# Altium PCB STM32F302VC_EVM.PcbDoc (part 4 of 19)
Units mil, origin at the board's own origin, x right, y up, seen from the top; angles counter-clockwise.
Board outline 3937.01 x 3937.01 mil, 2 copper layers (Top Layer, Bottom Layer); 117 components, 166 nets, 602 pads, 373 vias.
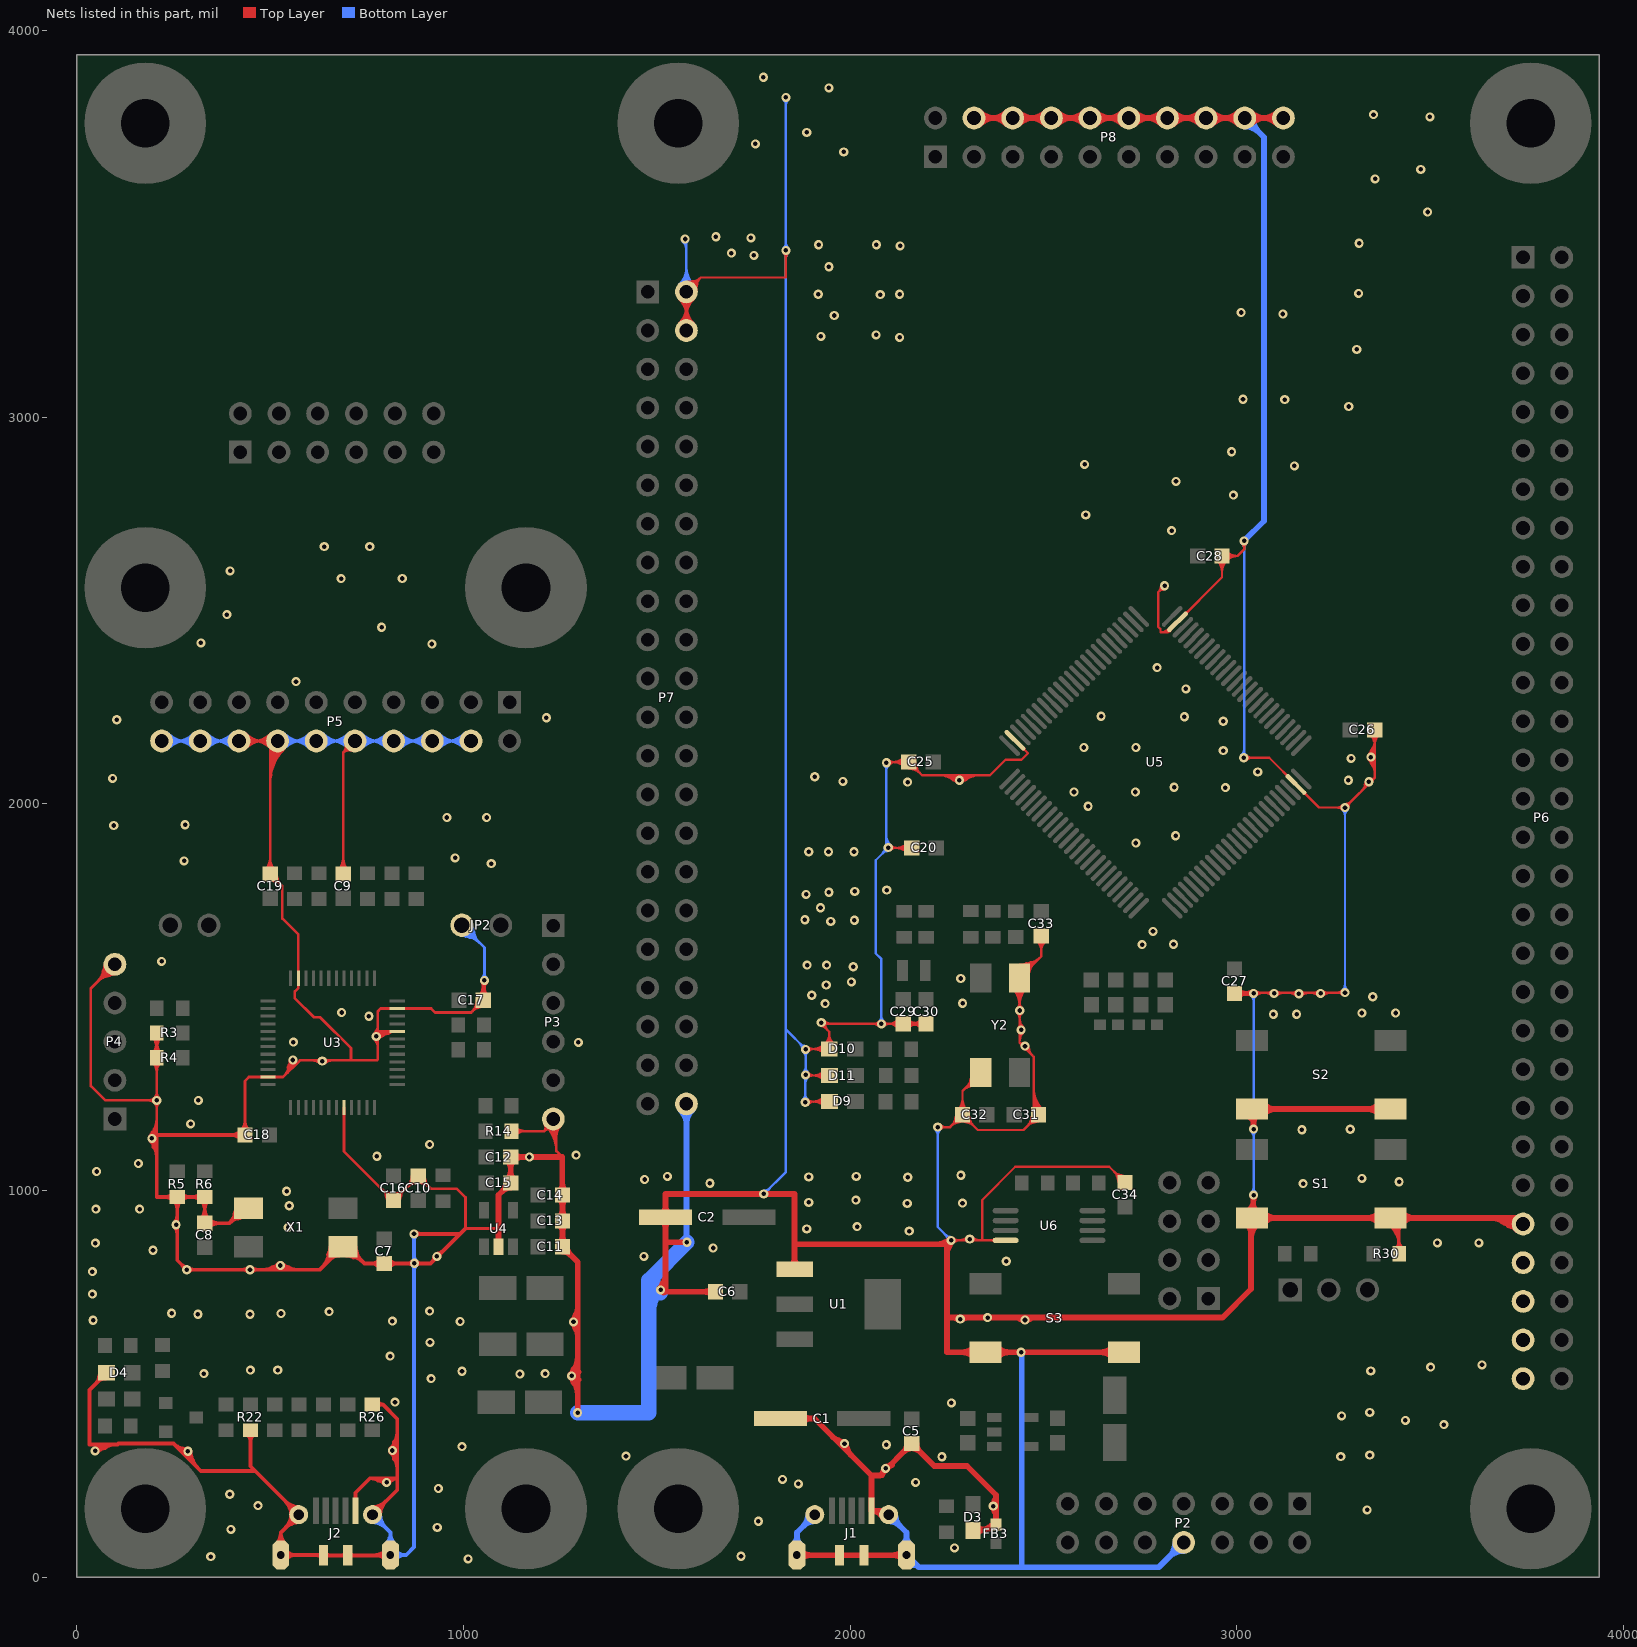
[diagram p4: the nets of this part, all layers, seen from the top]

## Via types
v1: diameter 23.62, hole 11.81, Top Layer to Bottom Layer, tented both sides, 372 vias
v2: diameter 50, hole 28, Top Layer to Bottom Layer, tented both sides, 1 vias

## Nets (pads, with @x,y where several pads share a name; then routed paths per layer and width w, separated by ;. In a path a pad name is that pad's centre, name@x,y a point inside that pad or via, vN(x,y) a via of type N, cw(c..) or ccw(c..) an arc to the next point about the centre after c; other vN are vias at no path point) (continued)
GND: (continued)
  Top Layer w6: 2682.27,1049.15 ccw(c2710.76,1077.64) C34.1@2710.76,1037.35 ; 2682.27,1049.15 ccw(c2710.76,1077.64) C34.1@2710.76,1037.35 ; 2682.27,1049.15 cw(c2653.79,1020.67) C34.1@2694.07,1020.67 ; 2682.27,1049.15 ccw(c2710.76,1077.64) C34.1@2710.76,1037.35 ; 2682.27,1049.15 cw(c2653.79,1020.67) C34.1@2694.07,1020.67 ; 2688.99,1039.63 ccw(c2716.13,1046.91) C34.1@2710.49,1019.38 ; 2688.99,1039.63 ccw(c2716.13,1046.91) C34.1@2710.49,1019.38 ; 2688.99,1039.63 ccw(c2716.13,1046.91) C34.1@2710.49,1019.38 ; C34.1@2691.5,1030.26 ccw(c2713.95,1036.27) C34.1@2709.29,1013.5 ; C34.1@2691.5,1030.26 ccw(c2713.95,1036.27) C34.1@2709.29,1013.5 ; C34.1@2691.5,1030.26 ccw(c2713.95,1036.27) C34.1@2709.29,1013.5 ; 2691.79,1042.44 cw(c2684.52,1015.3) C34.1@2712.04,1020.93 ; 2691.79,1042.44 cw(c2684.52,1015.3) C34.1@2712.04,1020.93 ; 2691.79,1042.44 cw(c2684.52,1015.3) C34.1@2712.04,1020.93 ; C34.1@2692.52,1038.91 cw(c2674.27,1020.67) C34.1@2700.07,1020.67 ; C34.1@2692.52,1038.91 ccw(c2710.76,1057.15) C34.1@2710.76,1031.35 ; C34.1@2692.52,1038.91 ccw(c2710.76,1057.15) C34.1@2710.76,1031.35 ; C34.1@2692.52,1038.91 cw(c2674.27,1020.67) C34.1@2700.07,1020.67 ; C34.1@2692.52,1038.91 ccw(c2710.76,1057.15) C34.1@2710.76,1031.35 ; C34.1@2692.52,1038.91 cw(c2674.27,1020.67) C34.1@2700.07,1020.67 ; C34.1@2701.17,1039.92 cw(c2695.15,1017.47) C34.1@2717.92,1022.14 ; C34.1@2701.17,1039.92 cw(c2695.15,1017.47) C34.1@2717.92,1022.14 ; C34.1@2701.17,1039.92 cw(c2695.15,1017.47) C34.1@2717.92,1022.14 ; 2797.95,2548.94 cw(c2812.99,2533.89) v1@2812.99,2555.17 ; 2797.95,2548.94 ccw(c2782.91,2563.98) v1@2804.18,2563.98 ; 2797.95,2548.94 ccw(c2782.91,2563.98) v1@2804.18,2563.98 ; 2797.95,2548.94 cw(c2812.99,2533.89) v1@2812.99,2555.17 ; 2797.95,2548.94 ccw(c2782.91,2563.98) v1@2804.18,2563.98 ; 2797.95,2548.94 cw(c2812.99,2533.89) v1@2812.99,2555.17 ; 2802.54,2557.86 cw(c2814.92,2554.54) v1@2812.35,2567.1 ; 2802.54,2557.86 cw(c2814.92,2554.54) v1@2812.35,2567.1 ; 2802.54,2557.86 cw(c2814.92,2554.54) v1@2812.35,2567.1 ; 2804.53,2443.9 ccw(c2804.53,2470.73) U5.74@2823.51,2451.76 ; 2804.53,2443.9 ccw(c2804.53,2470.73) U5.74@2823.51,2451.76 ; 2804.53,2443.9 ccw(c2804.53,2470.73) U5.74@2823.51,2451.76 ; 2806.88,2553.53 ccw(c2803.56,2565.91) v1@2816.12,2563.34 ; 2806.88,2553.53 ccw(c2803.56,2565.91) v1@2816.12,2563.34 ; 2806.88,2553.53 ccw(c2803.56,2565.91) v1@2816.12,2563.34 ; 2812.88,2445.62 cw(c2820.28,2432.82) U5.74@2824.69,2446.93 ; 2812.88,2445.62 cw(c2820.28,2432.82) U5.74@2824.69,2446.93 ; 2812.88,2445.62 cw(c2820.28,2432.82) U5.74@2824.69,2446.93 ; 2819.02,2443.9 ccw(c2819.02,2456.24) U5.74@2827.75,2447.51 ; 2819.02,2443.9 ccw(c2819.02,2456.24) U5.74@2827.75,2447.51 ; 2819.02,2443.9 ccw(c2819.02,2456.24) U5.74@2827.75,2447.51 ; 2820.6,2444.74 cw(c2825.56,2439.78) U5.74@2825.56,2446.8 ; 2820.6,2444.74 ccw(c2815.64,2449.7) U5.74@2822.66,2449.7 ; 2820.6,2444.74 ccw(c2815.64,2449.7) U5.74@2822.66,2449.7 ; 2820.6,2444.74 cw(c2825.56,2439.78) U5.74@2825.56,2446.8 ; 2820.6,2444.74 ccw(c2815.64,2449.7) U5.74@2822.66,2449.7 ; 2820.6,2444.74 cw(c2825.56,2439.78) U5.74@2825.56,2446.8 ; 2820.72,2443.46 ccw(c2818.43,2447.42) U5.74@2822.79,2448.82 ; 2820.72,2443.46 ccw(c2818.43,2447.42) U5.74@2822.79,2448.82 ; 2820.72,2443.46 ccw(c2818.43,2447.42) U5.74@2822.79,2448.82 ; U5.74@2867.32,2494.36 ccw(c2867.32,2501.38) 2872.28,2496.42 ; U5.74@2867.32,2494.36 ccw(c2867.32,2501.38) 2872.28,2496.42 ; U5.74@2867.32,2494.36 ccw(c2867.32,2501.38) 2872.28,2496.42 ; U5.74@2870.22,2491.46 cw(c2877.24,2491.46) 2872.28,2496.42 ; U5.74@2870.22,2491.46 cw(c2877.24,2491.46) 2872.28,2496.42 ; U5.74@2870.22,2491.46 cw(c2877.24,2491.46) 2872.28,2496.42 ; C28.1@2949.82,2628.95 cw(c2921.33,2600.47) 2961.61,2600.47 ; C28.1@2949.82,2628.95 cw(c2921.33,2600.47) 2961.61,2600.47 ; C28.1@2949.82,2628.95 cw(c2921.33,2600.47) 2961.61,2600.47 ; C28.1@2954.06,2633.19 cw(c2935.82,2614.95) 2961.61,2614.95 ; C28.1@2954.06,2633.19 cw(c2935.82,2614.95) 2961.61,2614.95 ; C28.1@2954.06,2633.19 cw(c2935.82,2614.95) 2961.61,2614.95 ; 2961.61,2600.47 cw(c3001.9,2600.47) C28.1@2973.41,2628.95 ; 2961.61,2600.47 cw(c3001.9,2600.47) C28.1@2973.41,2628.95 ; 2961.61,2600.47 cw(c3001.9,2600.47) C28.1@2973.41,2628.95 ; 2961.61,2614.95 cw(c2987.41,2614.95) C28.1@2969.17,2633.19 ; 2961.61,2614.95 cw(c2987.41,2614.95) C28.1@2969.17,2633.19 ; 2961.61,2614.95 cw(c2987.41,2614.95) C28.1@2969.17,2633.19 ; C28.1@2969.2,2633.22 cw(c2987.26,2615.32) 2987.26,2640.75 ; C28.1@2969.2,2633.22 cw(c2987.26,2615.32) 2987.26,2640.75 ; C28.1@2969.2,2633.22 cw(c2987.26,2615.32) 2987.26,2640.75 ; C28.1@2969.2,2648.27 ccw(c2987.26,2666.18) 2987.26,2640.75 ; C28.1@2969.2,2648.27 ccw(c2987.26,2666.18) 2987.26,2640.75 ; C28.1@2969.2,2648.27 ccw(c2987.26,2666.18) 2987.26,2640.75 ; C28.1@2973.46,2629 cw(c3001.66,2601.03) 3001.66,2640.75 ; C28.1@2973.46,2629 cw(c3001.66,2601.03) 3001.66,2640.75 ; C28.1@2973.46,2629 cw(c3001.66,2601.03) 3001.66,2640.75 ; C28.1@2973.46,2652.5 ccw(c3001.66,2680.46) 3001.66,2640.75 ; C28.1@2973.46,2652.5 ccw(c3001.66,2680.46) 3001.66,2640.75 ; C28.1@2973.46,2652.5 ccw(c3001.66,2680.46) 3001.66,2640.75 ; C27.1@3001.65,1502.29 cw(c3019.89,1484.05) 3019.89,1509.84 ; C27.1@3001.65,1502.29 cw(c3019.89,1484.05) 3019.89,1509.84 ; C27.1@3001.65,1502.29 cw(c3019.89,1484.05) 3019.89,1509.84 ; C27.1@3001.65,1517.4 ccw(c3019.89,1535.64) 3019.89,1509.84 ; C27.1@3001.65,1517.4 ccw(c3019.89,1535.64) 3019.89,1509.84 ; C27.1@3001.65,1517.4 ccw(c3019.89,1535.64) 3019.89,1509.84 ; C27.1@3005.89,1498.04 cw(c3034.38,1469.56) v1@3034.38,1509.84 ; C27.1@3005.89,1498.04 cw(c3034.38,1469.56) v1@3034.38,1509.84 ; C27.1@3005.89,1498.04 cw(c3034.38,1469.56) v1@3034.38,1509.84 ; C27.1@3005.89,1521.64 ccw(c3034.38,1550.12) v1@3034.38,1509.84 ; C27.1@3005.89,1521.64 ccw(c3034.38,1550.12) v1@3034.38,1509.84 ; C27.1@3005.89,1521.64 ccw(c3034.38,1550.12) v1@3034.38,1509.84 ; v1@3012.47,2673.89 cw(c2997.43,2658.85) 3018.7,2658.85 ; v1@3012.47,2673.89 cw(c2997.43,2658.85) 3018.7,2658.85 ; v1@3012.47,2673.89 cw(c2997.43,2658.85) 3018.7,2658.85 ; 3018.1,1505.48 cw(c3024.81,1480.45) v1@3038.62,1502.38 ; 3018.1,1505.48 cw(c3024.81,1480.45) v1@3038.62,1502.38 ; 3018.1,1505.48 cw(c3024.81,1480.45) v1@3038.62,1502.38 ; 3018.1,1505.48 cw(c3024.81,1480.45) v1@3038.62,1502.38 ; 3018.1,1505.48 cw(c3024.81,1480.45) v1@3038.62,1502.38 ; 3018.1,1505.48 cw(c3024.81,1480.45) v1@3038.62,1502.38 ; 3018.1,1514.2 ccw(c3024.81,1539.24) v1@3038.62,1517.3 ; 3018.1,1514.2 ccw(c3024.81,1539.24) v1@3038.62,1517.3 ; 3018.1,1514.2 ccw(c3024.81,1539.24) v1@3038.62,1517.3 ; 3018.1,1514.2 ccw(c3024.81,1539.24) v1@3038.62,1517.3 ; 3018.1,1514.2 ccw(c3024.81,1539.24) v1@3038.62,1517.3 ; 3018.1,1514.2 ccw(c3024.81,1539.24) v1@3038.62,1517.3 ; 3018.7,2658.85 cw(c3039.97,2658.85) v1@3024.93,2673.89 ; 3018.7,2658.85 cw(c3039.97,2658.85) v1@3024.93,2673.89 ; 3018.7,2658.85 cw(c3039.97,2658.85) v1@3024.93,2673.89 ; 3022.04,1509.84 cw(c3022.04,1488.57) v1@3037.08,1503.61 ; 3022.04,1509.84 ccw(c3022.04,1531.11) v1@3037.08,1516.07 ; 3022.04,1509.84 ccw(c3022.04,1531.11) v1@3037.08,1516.07 ; 3022.04,1509.84 cw(c3022.04,1488.57) v1@3037.08,1503.61 ; 3022.04,1509.84 ccw(c3022.04,1531.11) v1@3037.08,1516.07 ; 3022.04,1509.84 cw(c3022.04,1488.57) v1@3037.08,1503.61 ; v1@3023.95,2112.86 cw(c3038.99,2097.82) 3038.99,2119.09 ; v1@3023.95,2112.86 cw(c3038.99,2097.82) 3038.99,2119.09 ; v1@3023.95,2112.86 cw(c3038.99,2097.82) 3038.99,2119.09 ; v1@3023.95,2125.32 ccw(c3038.99,2140.37) 3038.99,2119.09 ; v1@3023.95,2125.32 ccw(c3038.99,2140.37) 3038.99,2119.09 ; v1@3023.95,2125.32 ccw(c3038.99,2140.37) 3038.99,2119.09 ; S1.2@3024.09,948.36 ccw(c2992.43,988.19) v1(3043.31,988.19) ; S1.2@3024.09,948.36 ccw(c2992.43,988.19) v1(3043.31,988.19) ; S1.2@3024.09,948.36 ccw(c2992.43,988.19) v1(3043.31,988.19) ; S2.2@3026.21,1189.89 cw(c3006.49,1158.8) v1@3043.31,1158.8 ; S2.2@3026.21,1189.89 cw(c3006.49,1158.8) v1@3043.31,1158.8 ; S2.2@3026.21,1189.89 cw(c3006.49,1158.8) v1@3043.31,1158.8 ; 3027.55,1508.01 ccw(c3024.09,1520.94) v1@3035.68,1514.25 ; 3027.55,1508.01 ccw(c3024.09,1520.94) v1@3035.68,1514.25 ; 3027.55,1508.01 ccw(c3024.09,1520.94) v1@3035.68,1514.25 ; 3027.55,1508.01 ccw(c3024.09,1520.94) v1@3035.68,1514.25 ; 3027.55,1508.01 ccw(c3024.09,1520.94) v1@3035.68,1514.25 ; 3027.55,1508.01 ccw(c3024.09,1520.94) v1@3035.68,1514.25 ; 3027.55,1511.67 cw(c3024.09,1498.75) v1@3035.68,1505.44 ; 3027.55,1511.67 cw(c3024.09,1498.75) v1@3035.68,1505.44 ; 3027.55,1511.67 cw(c3024.09,1498.75) v1@3035.68,1505.44 ; 3027.55,1511.67 cw(c3024.09,1498.75) v1@3035.68,1505.44 ; 3027.55,1511.67 cw(c3024.09,1498.75) v1@3035.68,1505.44 ; 3027.55,1511.67 cw(c3024.09,1498.75) v1@3035.68,1505.44 ; S1.2@3027.82,943.66 ccw(c3002.31,975.75) 3043.31,975.75 ; S1.2@3027.82,943.66 ccw(c3002.31,975.75) 3043.31,975.75 ; S1.2@3027.82,943.66 ccw(c3002.31,975.75) 3043.31,975.75 ; S2.2@3029.43,1194.96 cw(c3013.41,1169.72) v1@3043.31,1169.72 ; S2.2@3029.43,1194.96 cw(c3013.41,1169.72) v1@3043.31,1169.72 ; S2.2@3029.43,1194.96 cw(c3013.41,1169.72) v1@3043.31,1169.72 ; 3031.38,1509.04 cw(c3034.79,1496.3) v1@3041.81,1507.46 ; 3031.38,1509.04 cw(c3034.79,1496.3) v1@3041.81,1507.46 ; 3031.38,1509.04 cw(c3034.79,1496.3) v1@3041.81,1507.46 ; 3031.38,1509.04 cw(c3034.79,1496.3) v1@3041.81,1507.46 ; 3031.38,1509.04 cw(c3034.79,1496.3) v1@3041.81,1507.46 ; 3031.38,1509.04 cw(c3034.79,1496.3) v1@3041.81,1507.46 ; 3031.38,1510.65 ccw(c3034.79,1523.38) v1@3041.81,1512.22 ; 3031.38,1510.65 ccw(c3034.79,1523.38) v1@3041.81,1512.22 ; 3031.38,1510.65 ccw(c3034.79,1523.38) v1@3041.81,1512.22 ; 3031.38,1510.65 ccw(c3034.79,1523.38) v1@3041.81,1512.22 ; 3031.38,1510.65 ccw(c3034.79,1523.38) v1@3041.81,1512.22 ; 3031.38,1510.65 ccw(c3034.79,1523.38) v1@3041.81,1512.22 ; S1.2@3031.56,938.97 ccw(c3012.2,963.32) 3043.31,963.32 ; S1.2@3031.56,938.97 ccw(c3012.2,963.32) 3043.31,963.32 ; S1.2@3031.56,938.97 ccw(c3012.2,963.32) 3043.31,963.32 ; S2.2@3032.64,1200.03 cw(c3020.34,1180.63) 3043.31,1180.63 ; S2.2@3032.64,1200.03 cw(c3020.34,1180.63) 3043.31,1180.63 ; S2.2@3032.64,1200.03 cw(c3020.34,1180.63) 3043.31,1180.63 ; v1@3035.68,983.78 cw(c3017.25,973.15) 3037.8,967.64 ; v1@3035.68,983.78 cw(c3017.25,973.15) 3037.8,967.64 ; v1@3035.68,983.78 cw(c3017.25,973.15) 3037.8,967.64 ; v1@3035.68,983.78 cw(c3017.25,973.15) 3037.8,967.64 ; v1@3035.68,983.78 cw(c3017.25,973.15) 3037.8,967.64 ; v1@3035.68,983.78 cw(c3017.25,973.15) 3037.8,967.64 ; v1@3036.06,1163.96 ccw(c3022.8,1173.11) 3038.36,1177.28 ; v1@3036.06,1163.96 ccw(c3022.8,1173.11) 3038.36,1177.28 ; v1@3036.06,1163.96 ccw(c3022.8,1173.11) 3038.36,1177.28 ; v1@3036.06,1163.96 ccw(c3022.8,1173.11) 3038.36,1177.28 ; v1@3036.06,1163.96 ccw(c3022.8,1173.11) 3038.36,1177.28 ; v1@3036.06,1163.96 ccw(c3022.8,1173.11) 3038.36,1177.28 ; v1@3036.83,1164.93 ccw(c3025.01,1175.84) 3040.55,1180 ; v1@3036.83,1164.93 ccw(c3025.01,1175.84) 3040.55,1180 ; v1@3036.83,1164.93 ccw(c3025.01,1175.84) 3040.55,1180 ; v1@3036.83,1164.93 ccw(c3025.01,1175.84) 3040.55,1180 ; v1@3036.83,1164.93 ccw(c3025.01,1175.84) 3040.55,1180 ; v1@3036.83,1164.93 ccw(c3025.01,1175.84) 3040.55,1180 ; v1@3037.08,981.96 cw(c3022.04,966.92) 3043.31,966.92 ; v1@3037.08,981.96 cw(c3022.04,966.92) 3043.31,966.92 ; v1@3037.08,981.96 cw(c3022.04,966.92) 3043.31,966.92 ; v1@3037.08,1165.18 ccw(c3022.04,1180.22) 3043.31,1180.22 ; v1@3037.08,1165.18 ccw(c3022.04,1180.22) 3043.31,1180.22 ; v1@3037.08,1165.18 ccw(c3022.04,1180.22) 3043.31,1180.22 ; 3037.8,967.64 cw(c3058.35,962.14) v1@3047.71,980.56 ; 3037.8,967.64 cw(c3058.35,962.14) v1@3047.71,980.56 ; 3037.8,967.64 cw(c3058.35,962.14) v1@3047.71,980.56 ; 3037.8,967.64 cw(c3058.35,962.14) v1@3047.71,980.56 ; 3037.8,967.64 cw(c3058.35,962.14) v1@3047.71,980.56 ; 3037.8,967.64 cw(c3058.35,962.14) v1@3047.71,980.56 ; 3038.36,1177.28 ccw(c3053.78,1181.41) v1@3047.03,1166.94 ; 3038.36,1177.28 ccw(c3053.78,1181.41) v1@3047.03,1166.94 ; 3038.36,1177.28 ccw(c3053.78,1181.41) v1@3047.03,1166.94 ; 3038.36,1177.28 ccw(c3053.78,1181.41) v1@3047.03,1166.94 ; 3038.36,1177.28 ccw(c3053.78,1181.41) v1@3047.03,1166.94 ; 3038.36,1177.28 ccw(c3053.78,1181.41) v1@3047.03,1166.94 ; v1@3038.63,980.72 cw(c3031.1,968.7) 3044.93,971.88 ; v1@3038.63,980.72 cw(c3031.1,968.7) 3044.93,971.88 ; v1@3038.63,980.72 cw(c3031.1,968.7) 3044.93,971.88 ; v1@3038.63,980.72 cw(c3031.1,968.7) 3044.93,971.88 ; v1@3038.63,980.72 cw(c3031.1,968.7) 3044.93,971.88 ; v1@3038.63,980.72 cw(c3031.1,968.7) 3044.93,971.88 ; v1@3038.9,1166.58 ccw(c3029.1,1183.55) 3048.03,1178.48 ; v1@3038.9,1166.58 ccw(c3029.1,1183.55) 3048.03,1178.48 ; v1@3038.9,1166.58 ccw(c3029.1,1183.55) 3048.03,1178.48 ; v1@3038.9,1166.58 ccw(c3029.1,1183.55) 3048.03,1178.48 ; v1@3038.9,1166.58 ccw(c3029.1,1183.55) 3048.03,1178.48 ; v1@3038.9,1166.58 ccw(c3029.1,1183.55) 3048.03,1178.48 ; 3042.23,1173.72 ccw(c3053.59,1176.77) v1@3047.71,1166.58 ; 3042.23,1173.72 ccw(c3053.59,1176.77) v1@3047.71,1166.58 ; 3042.23,1173.72 ccw(c3053.59,1176.77) v1@3047.71,1166.58 ; 3042.23,1173.72 ccw(c3053.59,1176.77) v1@3047.71,1166.58 ; 3042.23,1173.72 ccw(c3053.59,1176.77) v1@3047.71,1166.58 ; 3042.23,1173.72 ccw(c3053.59,1176.77) v1@3047.71,1166.58 ; 3043.31,964.43 ccw(c3074.67,964.43) S1.2@3052.49,942.26 ; 3043.31,964.43 ccw(c3074.67,964.43) S1.2@3052.49,942.26 ; 3043.31,964.43 ccw(c3074.67,964.43) S1.2@3052.49,942.26 ; 3043.31,966.92 cw(c3064.58,966.92) v1@3049.54,981.96 ; 3043.31,966.92 cw(c3064.58,966.92) v1@3049.54,981.96 ; 3043.31,966.92 cw(c3064.58,966.92) v1@3049.54,981.96 ; v1@3043.31,978.92 ccw(c3089.16,978.92) S1.2@3056.74,946.5 ; v1@3043.31,978.92 ccw(c3089.16,978.92) S1.2@3056.74,946.5 ; v1@3043.31,978.92 ccw(c3089.16,978.92) S1.2@3056.74,946.5 ; v1@3043.31,1160.84 cw(c3089.16,1160.84) S2.2@3056.74,1193.26 ; v1@3043.31,1160.84 cw(c3089.16,1160.84) S2.2@3056.74,1193.26 ; v1@3043.31,1160.84 cw(c3089.16,1160.84) S2.2@3056.74,1193.26 ; 3043.31,1175.33 cw(c3074.67,1175.33) S2.2@3052.49,1197.51 ; 3043.31,1175.33 cw(c3074.67,1175.33) S2.2@3052.49,1197.51 ; 3043.31,1175.33 cw(c3074.67,1175.33) S2.2@3052.49,1197.51 ; 3043.31,1180.22 ccw(c3064.58,1180.22) v1@3049.54,1165.18 ; 3043.31,1180.22 ccw(c3064.58,1180.22) v1@3049.54,1165.18 ; 3043.31,1180.22 ccw(c3064.58,1180.22) v1@3049.54,1165.18 ; 3046.95,963.07 cw(c3072.31,968.9) v1@3050.64,983.31 ; 3046.95,963.07 cw(c3072.31,968.9) v1@3050.64,983.31 ; 3046.95,963.07 cw(c3072.31,968.9) v1@3050.64,983.31 ; 3046.95,963.07 cw(c3072.31,968.9) v1@3050.64,983.31 ; 3046.95,963.07 cw(c3072.31,968.9) v1@3050.64,983.31 ; 3046.95,963.07 cw(c3072.31,968.9) v1@3050.64,983.31 ; 3048.65,1180.77 ccw(c3070.81,1174.83) v1@3050.94,1163.36 ; 3048.65,1180.77 ccw(c3070.81,1174.83) v1@3050.94,1163.36 ; 3048.65,1180.77 ccw(c3070.81,1174.83) v1@3050.94,1163.36 ; 3048.65,1180.77 ccw(c3070.81,1174.83) v1@3050.94,1163.36 ; 3048.65,1180.77 ccw(c3070.81,1174.83) v1@3050.94,1163.36 ; 3048.65,1180.77 ccw(c3070.81,1174.83) v1@3050.94,1163.36 ; v1@3049.54,1503.61 cw(c3069.33,1483.82) 3069.33,1511.81 ; v1@3049.54,1503.61 cw(c3069.33,1483.82) 3069.33,1511.81 ; v1@3049.54,1503.61 cw(c3069.33,1483.82) 3069.33,1511.81 ; v1@3049.54,1516.07 ccw(c3059.83,1526.36) 3059.83,1511.81 ; v1@3049.54,1516.07 ccw(c3059.83,1526.36) 3059.83,1511.81 ; v1@3049.54,1516.07 ccw(c3059.83,1526.36) 3059.83,1511.81 ; 3070.43,1511.81 cw(c3070.43,1483.82) v1@3090.23,1503.61 ; 3070.43,1511.81 cw(c3070.43,1483.82) v1@3090.23,1503.61 ; 3070.43,1511.81 cw(c3070.43,1483.82) v1@3090.23,1503.61 ; 3079.94,1511.81 ccw(c3079.94,1526.36) v1@3090.23,1516.07 ; 3079.94,1511.81 ccw(c3079.94,1526.36) v1@3090.23,1516.07 ; 3079.94,1511.81 ccw(c3079.94,1526.36) v1@3090.23,1516.07 ; v1@3102.69,1503.61 cw(c3122.48,1483.82) 3122.48,1511.81 ; v1@3102.69,1503.61 cw(c3122.48,1483.82) 3122.48,1511.81 ; v1@3102.69,1503.61 cw(c3122.48,1483.82) 3122.48,1511.81 ; v1@3102.69,1516.07 ccw(c3112.98,1526.36) 3112.98,1511.81 ; v1@3102.69,1516.07 ccw(c3112.98,1526.36) 3112.98,1511.81 ; v1@3102.69,1516.07 ccw(c3112.98,1526.36) 3112.98,1511.81 ; 3126.83,2076.05 cw(c3121.87,2071.09) U5.49@3128.88,2071.09 ; 3126.83,2076.05 ccw(c3131.79,2081.01) U5.49@3131.79,2074 ; 3126.83,2076.05 ccw(c3131.79,2081.01) U5.49@3131.79,2074 ; 3126.83,2076.05 cw(c3121.87,2071.09) U5.49@3128.88,2071.09 ; 3126.83,2076.05 ccw(c3131.79,2081.01) U5.49@3131.79,2074 ; 3126.83,2076.05 cw(c3121.87,2071.09) U5.49@3128.88,2071.09 ; 3132.03,1511.81 cw(c3132.03,1480.46) v1@3154.2,1502.63 ; 3132.03,1511.81 cw(c3132.03,1480.46) v1@3154.2,1502.63 ; 3132.03,1511.81 cw(c3132.03,1480.46) v1@3154.2,1502.63 ; 3146.29,1511.81 ccw(c3146.29,1523) v1@3154.2,1515.09 ; 3146.29,1511.81 ccw(c3146.29,1523) v1@3154.2,1515.09 ; 3146.29,1511.81 ccw(c3146.29,1523) v1@3154.2,1515.09 ; 3146.52,1511.81 cw(c3146.52,1494.94) v1@3158.45,1506.87 ; 3146.52,1511.81 cw(c3146.52,1494.94) v1@3158.45,1506.87 ; 3146.52,1511.81 cw(c3146.52,1494.94) v1@3158.45,1506.87 ; v1@3162.42,1506.87 cw(c3174.35,1494.94) 3174.35,1511.81 ; v1@3162.42,1506.87 cw(c3174.35,1494.94) 3174.35,1511.81 ; v1@3162.42,1506.87 cw(c3174.35,1494.94) 3174.35,1511.81 ; v1@3166.66,1502.63 cw(c3188.83,1480.46) 3188.83,1511.81 ; v1@3166.66,1502.63 cw(c3188.83,1480.46) 3188.83,1511.81 ; v1@3166.66,1502.63 cw(c3188.83,1480.46) 3188.83,1511.81 ; v1@3166.66,1515.09 ccw(c3174.58,1523) 3174.58,1511.81 ; v1@3166.66,1515.09 ccw(c3174.58,1523) 3174.58,1511.81 ; v1@3166.66,1515.09 ccw(c3174.58,1523) 3174.58,1511.81 ; U5.49@3173.55,2026.43 cw(c3173.55,2019.41) 3178.51,2024.37 ; U5.49@3173.55,2026.43 cw(c3173.55,2019.41) 3178.51,2024.37 ; U5.49@3173.55,2026.43 cw(c3173.55,2019.41) 3178.51,2024.37 ; U5.49@3176.45,2029.33 ccw(c3183.47,2029.33) 3178.51,2024.37 ; U5.49@3176.45,2029.33 ccw(c3183.47,2029.33) 3178.51,2024.37 ; U5.49@3176.45,2029.33 ccw(c3183.47,2029.33) 3178.51,2024.37 ; 3190.51,1511.81 cw(c3190.51,1483.82) v1@3210.31,1503.61 ; 3190.51,1511.81 cw(c3190.51,1483.82) v1@3210.31,1503.61 ; 3190.51,1511.81 cw(c3190.51,1483.82) v1@3210.31,1503.61 ; 3200.02,1511.81 ccw(c3200.02,1526.36) v1@3210.31,1516.07 ; 3200.02,1511.81 ccw(c3200.02,1526.36) v1@3210.31,1516.07 ; 3200.02,1511.81 ccw(c3200.02,1526.36) v1@3210.31,1516.07 ; v1@3222.77,1503.61 cw(c3242.56,1483.82) 3242.56,1511.81 ; v1@3222.77,1503.61 cw(c3242.56,1483.82) 3242.56,1511.81 ; v1@3222.77,1503.61 cw(c3242.56,1483.82) 3242.56,1511.81 ; v1@3222.77,1516.07 ccw(c3233.05,1526.36) 3233.05,1511.81 ; v1@3222.77,1516.07 ccw(c3233.05,1526.36) 3233.05,1511.81 ; v1@3222.77,1516.07 ccw(c3233.05,1526.36) 3233.05,1511.81 ; 3258.26,1511.81 cw(c3258.26,1490.54) v1@3273.3,1505.58 ; 3258.26,1511.81 ccw(c3258.26,1533.08) v1@3273.3,1518.04 ; 3258.26,1511.81 ccw(c3258.26,1533.08) v1@3273.3,1518.04 ; 3258.26,1511.81 cw(c3258.26,1490.54) v1@3273.3,1505.58 ; 3258.26,1511.81 ccw(c3258.26,1533.08) v1@3273.3,1518.04 ; 3258.26,1511.81 cw(c3258.26,1490.54) v1@3273.3,1505.58 ; 3258.26,1990.28 cw(c3258.26,1969.01) v1@3273.3,1984.05 ; 3258.26,1990.28 ccw(c3258.26,2011.55) v1@3273.3,1996.51 ; 3258.26,1990.28 ccw(c3258.26,2011.55) v1@3273.3,1996.51 ; 3258.26,1990.28 cw(c3258.26,1969.01) v1@3273.3,1984.05 ; 3258.26,1990.28 ccw(c3258.26,2011.55) v1@3273.3,1996.51 ; 3258.26,1990.28 cw(c3258.26,1969.01) v1@3273.3,1984.05 ; v1@3276.4,1990.92 cw(c3288.96,1988.35) 3285.64,2000.73 ; v1@3276.4,1990.92 cw(c3288.96,1988.35) 3285.64,2000.73 ; v1@3276.4,1990.92 cw(c3288.96,1988.35) 3285.64,2000.73 ; v1@3279.53,1999.09 ccw(c3279.53,2020.36) 3294.57,2005.32 ; v1@3279.53,1999.09 ccw(c3279.53,2020.36) 3294.57,2005.32 ; v1@3279.53,1999.09 ccw(c3279.53,2020.36) 3294.57,2005.32 ; v1@3280.17,1987.16 ccw(c3277.6,1999.72) 3289.98,1996.4 ; v1@3280.17,1987.16 ccw(c3277.6,1999.72) 3289.98,1996.4 ; v1@3280.17,1987.16 ccw(c3277.6,1999.72) 3289.98,1996.4 ; v1@3288.34,1990.28 cw(c3309.61,1990.28) 3294.57,2005.32 ; v1@3288.34,1990.28 cw(c3309.61,1990.28) 3294.57,2005.32 ; v1@3288.34,1990.28 cw(c3309.61,1990.28) 3294.57,2005.32 ; 3323.1,2033.86 ccw(c3299.87,2057.09) v1@3332.72,2057.09 ; 3323.1,2033.86 ccw(c3299.87,2057.09) v1@3332.72,2057.09 ; 3323.1,2033.86 ccw(c3299.87,2057.09) v1@3332.72,2057.09 ; 3327.56,2037.81 cw(c3351.41,2031.42) v1@3342.54,2054.46 ; 3327.56,2037.81 cw(c3351.41,2031.42) v1@3342.54,2054.46 ; 3327.56,2037.81 cw(c3351.41,2031.42) v1@3342.54,2054.46 ; 3330.61,2049.19 cw(c3346.18,2045.02) v1@3340.39,2060.06 ; 3330.61,2049.19 cw(c3346.18,2045.02) v1@3340.39,2060.06 ; 3330.61,2049.19 cw(c3346.18,2045.02) v1@3340.39,2060.06 ; 3333.35,2044.1 ccw(c3320.36,2057.09) v1@3338.72,2057.09 ; 3333.35,2044.1 ccw(c3320.36,2057.09) v1@3338.72,2057.09 ; 3333.35,2044.1 ccw(c3320.36,2057.09) v1@3338.72,2057.09 ; 3334.68,2045.44 cw(c3341.54,2038.58) v1@3341.54,2048.28 ; 3334.68,2045.44 cw(c3341.54,2038.58) v1@3341.54,2048.28 ; 3334.68,2045.44 cw(c3341.54,2038.58) v1@3341.54,2048.28 ; v1@3340.23,2114.74 cw(c3301.42,2075.94) 3356.3,2075.94 ; v1@3340.23,2114.74 cw(c3301.42,2075.94) 3356.3,2075.94 ; v1@3340.23,2114.74 cw(c3301.42,2075.94) 3356.3,2075.94 ; v1@3340.23,2127.2 ccw(c3301.42,2166) 3356.3,2166 ; v1@3340.23,2127.2 ccw(c3301.42,2166) 3356.3,2166 ; v1@3340.23,2127.2 ccw(c3301.42,2166) 3356.3,2166 ; v1@3344.18,2112.46 cw(c3341.07,2100.87) 3351.46,2106.87 ; v1@3344.18,2112.46 cw(c3341.07,2100.87) 3351.46,2106.87 ; v1@3344.18,2112.46 cw(c3341.07,2100.87) 3351.46,2106.87 ; v1@3344.18,2129.48 ccw(c3341.07,2141.07) 3351.46,2135.07 ; v1@3344.18,2129.48 ccw(c3341.07,2141.07) 3351.46,2135.07 ; v1@3344.18,2129.48 ccw(c3341.07,2141.07) 3351.46,2135.07 ; v1@3344.47,2118.98 cw(c3315.91,2090.42) 3356.3,2090.42 ; v1@3344.47,2118.98 cw(c3315.91,2090.42) 3356.3,2090.42 ; v1@3344.47,2118.98 cw(c3315.91,2090.42) 3356.3,2090.42 ; v1@3344.47,2122.96 ccw(c3315.91,2151.52) 3356.3,2151.52 ; v1@3344.47,2122.96 ccw(c3315.91,2151.52) 3356.3,2151.52 ; v1@3344.47,2122.96 ccw(c3315.91,2151.52) 3356.3,2151.52 ; C26.1@3344.5,2179.15 cw(c3316.02,2150.66) 3356.3,2150.66 ; C26.1@3344.5,2179.15 cw(c3316.02,2150.66) 3356.3,2150.66 ; C26.1@3344.5,2179.15 cw(c3316.02,2150.66) 3356.3,2150.66 ; v1@3345.23,2065.08 ccw(c3349.35,2074) 3356.3,2067.05 ; v1@3345.23,2065.08 ccw(c3349.35,2074) 3356.3,2067.05 ; v1@3345.23,2065.08 ccw(c3349.35,2074) 3356.3,2067.05 ; 3347.09,2103.58 cw(c3358.12,2110.37) v1@3348.54,2119.08 ; 3347.09,2103.58 cw(c3358.12,2110.37) v1@3348.54,2119.08 ; 3347.09,2103.58 cw(c3358.12,2110.37) v1@3348.54,2119.08 ; 3347.09,2138.36 ccw(c3358.12,2131.57) v1@3348.54,2122.86 ; 3347.09,2138.36 ccw(c3358.12,2131.57) v1@3348.54,2122.86 ; 3347.09,2138.36 ccw(c3358.12,2131.57) v1@3348.54,2122.86 ; v1@3348.71,2118.72 ccw(c3330.39,2137.03) 3356.3,2137.03 ; v1@3348.71,2118.72 ccw(c3330.39,2137.03) 3356.3,2137.03 ; v1@3348.71,2118.72 ccw(c3330.39,2137.03) 3356.3,2137.03 ; v1@3348.71,2123.23 cw(c3330.39,2104.91) 3356.3,2104.91 ; v1@3348.71,2123.23 cw(c3330.39,2104.91) 3356.3,2104.91 ; v1@3348.71,2123.23 cw(c3330.39,2104.91) 3356.3,2104.91 ; C26.1@3348.74,2183.39 cw(c3330.5,2165.15) 3356.3,2165.15 ; C26.1@3348.74,2183.39 cw(c3330.5,2165.15) 3356.3,2165.15 ; C26.1@3348.74,2183.39 cw(c3330.5,2165.15) 3356.3,2165.15 ; v1@3349.36,2112.65 cw(c3351.28,2107.17) 3356.31,2110.07 ; v1@3349.36,2112.65 cw(c3351.28,2107.17) 3356.31,2110.07 ; v1@3349.36,2112.65 cw(c3351.28,2107.17) 3356.31,2110.07 ; v1@3349.36,2129.29 ccw(c3351.28,2134.77) 3356.31,2131.87 ; v1@3349.36,2129.29 ccw(c3351.28,2134.77) 3356.31,2131.87 ; v1@3349.36,2129.29 ccw(c3351.28,2134.77) 3356.31,2131.87 ; v1@3350.35,2057.09 cw(c3360.04,2057.09) 3353.19,2063.94 ; v1@3350.35,2057.09 cw(c3360.04,2057.09) 3353.19,2063.94 ; v1@3350.35,2057.09 cw(c3360.04,2057.09) 3353.19,2063.94 ; 3351.28,2096.79 cw(c3364.27,2104.79) v1@3352.98,2115.05 ; 3351.28,2096.79 cw(c3364.27,2104.79) v1@3352.98,2115.05 ; 3351.28,2096.79 cw(c3364.27,2104.79) v1@3352.98,2115.05 ; 3351.28,2145.16 ccw(c3364.27,2137.16) v1@3352.98,2126.9 ; 3351.28,2145.16 ccw(c3364.27,2137.16) v1@3352.98,2126.9 ; 3351.28,2145.16 ccw(c3364.27,2137.16) v1@3352.98,2126.9 ; v1@3354.11,2116.6 ccw(c3366.63,2109.45) 3354.14,2102.24 ; v1@3354.11,2116.6 ccw(c3366.63,2109.45) 3354.14,2102.24 ; v1@3354.11,2116.6 ccw(c3366.63,2109.45) 3354.14,2102.24 ; v1@3354.11,2125.34 cw(c3366.63,2132.5) 3354.14,2139.71 ; v1@3354.11,2125.34 cw(c3366.63,2132.5) 3354.14,2139.71 ; v1@3354.11,2125.34 cw(c3366.63,2132.5) 3354.14,2139.71 ; v1@3354.97,2118.69 ccw(c3365.36,2115.91) 3356.04,2110.53 ; v1@3354.97,2118.69 ccw(c3365.36,2115.91) 3356.04,2110.53 ; v1@3354.97,2118.69 ccw(c3365.36,2115.91) 3356.04,2110.53 ; v1@3354.97,2123.25 cw(c3365.36,2126.04) 3356.04,2131.41 ; v1@3354.97,2123.25 cw(c3365.36,2126.04) 3356.04,2131.41 ; v1@3354.97,2123.25 cw(c3365.36,2126.04) 3356.04,2131.41 ; 3356.3,2150.66 cw(c3396.58,2150.66) C26.1@3368.1,2179.15 ; 3356.3,2150.66 cw(c3396.58,2150.66) C26.1@3368.1,2179.15 ; 3356.3,2150.66 cw(c3396.58,2150.66) C26.1@3368.1,2179.15 ; 3356.3,2165.15 cw(c3382.1,2165.15) C26.1@3363.85,2183.39 ; 3356.3,2165.15 cw(c3382.1,2165.15) C26.1@3363.85,2183.39 ; 3356.3,2165.15 cw(c3382.1,2165.15) C26.1@3363.85,2183.39 ; S1.1@3394.05,911.77 cw(c3330.74,848.46) R30.2@3420.28,848.46 ; S1.1@3394.05,911.77 cw(c3330.74,848.46) R30.2@3420.28,848.46 ; S1.1@3394.05,911.77 cw(c3330.74,848.46) R30.2@3420.28,848.46 ; S1.1@3398.29,916.01 cw(c3345.23,862.94) 3420.28,862.94 ; S1.1@3398.29,916.01 cw(c3345.23,862.94) 3420.28,862.94 ; S1.1@3398.29,916.01 cw(c3345.23,862.94) 3420.28,862.94 ; S1.1@3402.54,920.25 cw(c3359.71,877.43) 3420.28,877.43 ; S1.1@3402.54,920.25 cw(c3359.71,877.43) 3420.28,877.43 ; S1.1@3402.54,920.25 cw(c3359.71,877.43) 3420.28,877.43 ; S1.1@3406.52,905.07 cw(c3404.06,893.02) 3414.71,899.17 ; S1.1@3406.52,905.07 cw(c3404.06,893.02) 3414.71,899.17 ; S1.1@3406.52,905.07 cw(c3404.06,893.02) 3414.71,899.17 ; S1.1@3406.78,924.5 cw(c3374.2,891.91) 3420.28,891.91 ; S1.1@3406.78,924.5 cw(c3374.2,891.91) 3420.28,891.91 ; S1.1@3406.78,924.5 cw(c3374.2,891.91) 3420.28,891.91 ; R30.2@3409.87,848.99 ccw(c3384.75,874.11) 3420.28,874.11 ; R30.2@3409.87,848.99 ccw(c3384.75,874.11) 3420.28,874.11 ; R30.2@3409.87,848.99 ccw(c3384.75,874.11) 3420.28,874.11 ; R30.2@3410.23,849.34 ccw(c3394.66,866.01) 3417.23,869.3 ; R30.2@3410.23,849.34 ccw(c3394.66,866.01) 3417.23,869.3 ; R30.2@3410.23,849.34 ccw(c3394.66,866.01) 3417.23,869.3 ; R30.2@3410.23,849.34 ccw(c3394.66,866.01) 3417.23,869.3 ; R30.2@3410.23,849.34 ccw(c3394.66,866.01) 3417.23,869.3 ; R30.2@3414.11,844.75 ccw(c3399.23,859.63) 3420.28,859.63 ; R30.2@3414.11,844.75 ccw(c3399.23,859.63) 3420.28,859.63 ; R30.2@3414.11,844.75 ccw(c3399.23,859.63) 3420.28,859.63 ; R30.2@3414.33,844.95 ccw(c3404.18,855.82) 3418.89,857.96 ; R30.2@3414.33,844.95 ccw(c3404.18,855.82) 3418.89,857.96 ; R30.2@3414.33,844.95 ccw(c3404.18,855.82) 3418.89,857.96 ; R30.2@3414.33,844.95 ccw(c3404.18,855.82) 3418.89,857.96 ; R30.2@3414.33,844.95 ccw(c3404.18,855.82) 3418.89,857.96 ; 3417.23,869.3 ccw(c3444.65,873.3) R30.2@3428.73,850.63 ; 3417.23,869.3 ccw(c3444.65,873.3) R30.2@3428.73,850.63 ; 3417.23,869.3 ccw(c3444.65,873.3) R30.2@3428.73,850.63 ; 3417.23,869.3 ccw(c3444.65,873.3) R30.2@3428.73,850.63 ; 3417.23,869.3 ccw(c3444.65,873.3) R30.2@3428.73,850.63 ; 3420.28,859.63 ccw(c3441.32,859.63) R30.2@3426.44,844.75 ; 3420.28,859.63 ccw(c3441.32,859.63) R30.2@3426.44,844.75 ; 3420.28,859.63 ccw(c3441.32,859.63) R30.2@3426.44,844.75 ; 3420.28,874.11 ccw(c3455.8,874.11) R30.2@3430.68,848.99 ; 3420.28,874.11 ccw(c3455.8,874.11) R30.2@3430.68,848.99 ; 3420.28,874.11 ccw(c3455.8,874.11) R30.2@3430.68,848.99 ; 3420.28,891.23 cw(c3449.32,891.23) S1.1@3428.78,911.77 ; 3420.28,891.23 cw(c3449.32,891.23) S1.1@3428.78,911.77 ; 3420.28,891.23 cw(c3449.32,891.23) S1.1@3428.78,911.77